# Altium PCB VariableStroboscope_Rev1.1.PcbDoc
Units mm, origin at the board's own origin, x right, y up, seen from the top; angles counter-clockwise.
Board outline 22 x 22 mm, 2 copper layers (Top Layer, Bottom Layer); 12 components, 9 nets, 38 pads, 0 vias.
Unrouted connection lines stored in the file: 1.
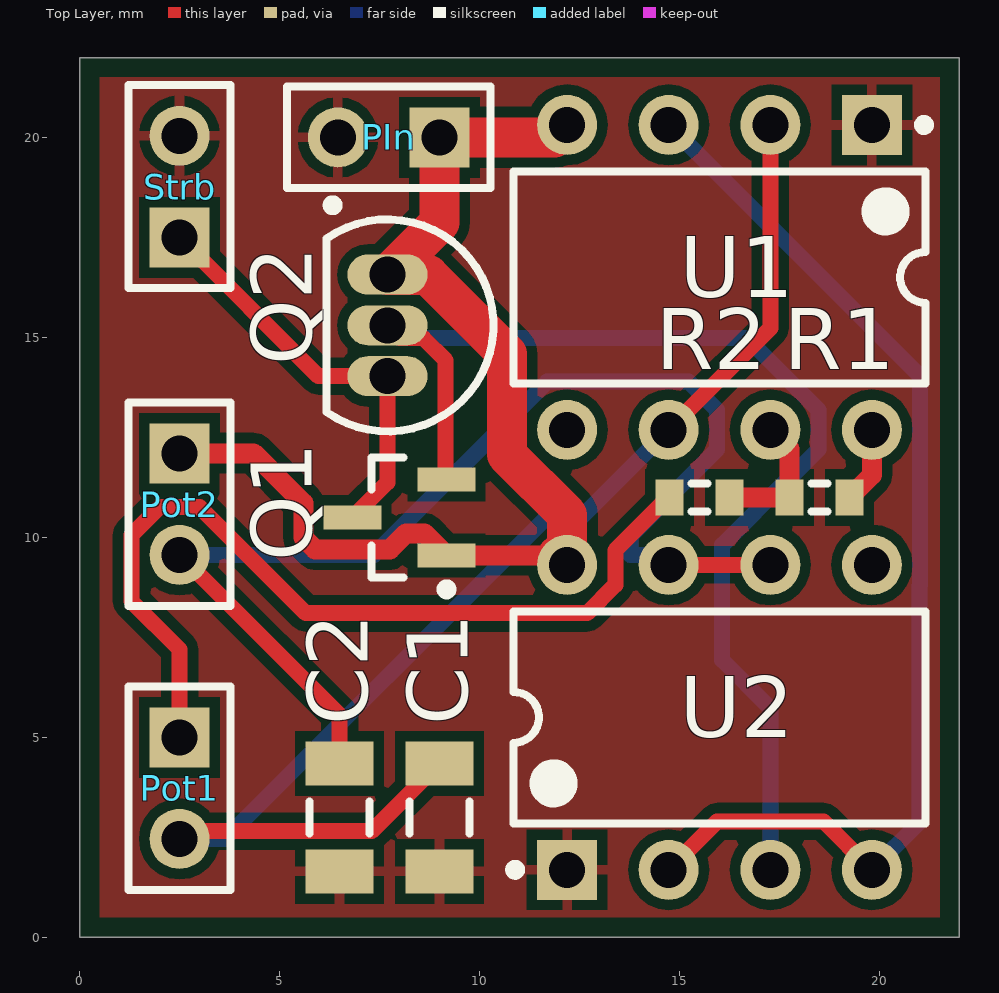
[diagram p0: Top Layer view]
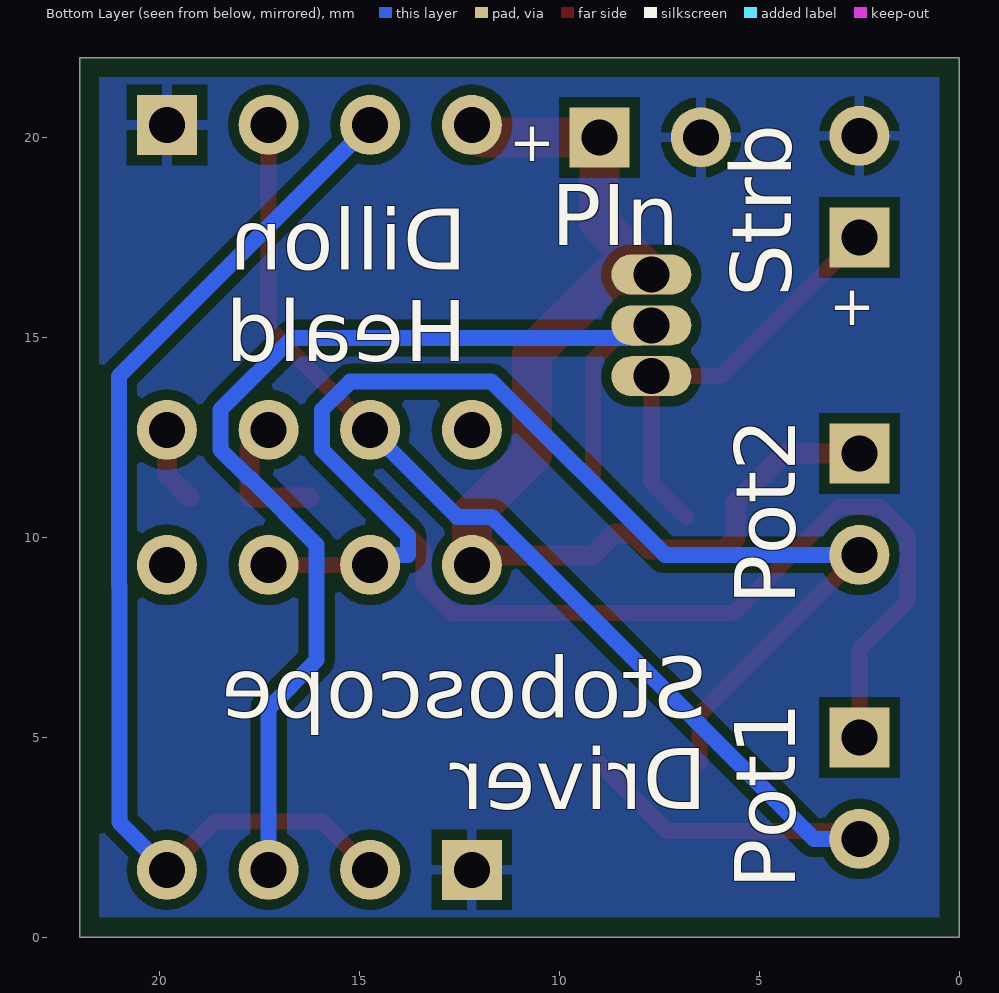
[diagram p1: Bottom Layer view, seen from below]

## Layer stack, top to bottom
Top Solder: solder mask 0.0102, Solder Resist, Dk 3.5
Top Layer: signal copper 0.0356
Dielectric 1: dielectric 0.32, FR-4, Dk 4.8
Bottom Layer: signal copper 0.0356
Bottom Solder: solder mask 0.0102, Solder Resist, Dk 3.5

## Board outline
0,0 21.996,0 21.996,21.996 0,21.996

## Design rules (kind name [scope] priority, off if disabled: settings)
Clearance [All] p1: gap=0.254
HoleSize [All] p1: absolutevalues=TRUE maxlimit=2.54 minlimit=0.254 maxpercent=80.000 minpercent=20.000
PolygonConnect [All] p1: connectstyle=Relief reliefconductorwidth=0.254 reliefentries=4 polygonreliefangle="90 Angle" airgapwidth=0.254
RoomDefinition VariableStoboscope_Rev1.0 [InComponentClass('VariableStoboscope_Rev1.0')] p1: confinementstyle=ConfineIn formatcopy=TRUE lockcomponents=FALSE outline 0.5,0.5 21.5,0.5 21.5,21.5 0.5,21.5
RoutingVias [All] p1: holewidth=0.711 width=1.27 viastyle="Through Hole" minholewidth=0.711 minwidth=1.27 maxholewidth=0.711 maxwidth=1.27
SolderMaskExpansion [All] p1: expansion=0.102
Width [All] p1: maxlimit=1 minlimit=0.4 preferedwidth=0.5
29 further rules are at their usual default settings.

## Components (designator, comment, footprint, x,y, rotation, side; value= is the part's Value field where it differs from the comment)
C1 "Cap Semi" C1206 9,3 r90 top
C2 "Cap Semi" C1206 6.5,3 r90 top
PIn "Header 2" HDR1X2 9,20 r180 top
Pot1 "PotExt1" HDR1X2 2.5,5 r270 top
Pot2 "PotExt2" HDR1X2 2.5,12.1 r270 top
Q1 "BD439_1" SOT-23B_M 8,10.5 r180 top
Q2 "BD439_2" TO-226-AA 7.7,15.3 r180 top
R1 "Res3" J1-0603 18.5,11 r0 top
R2 "Res3" J1-0603 15.5,11 r180 top
Strb "Header 2" HDR1X2 2.5,17.5 r90 top
U1 "LM555CN/NOPB" N08E 16,16.5 r270 top
U2 "LM555CN/NOPB" N08E 16,5.5 r90 top

## Footprints (in the part's own frame and the unit in brackets; to place one, negate y for a bottom-side part, rotate by r counter-clockwise, add the part's x,y. Pads: shape width x height; smd on the part's side, far side on the other; paste and mask are expansions set on the pad)
C1206 [mm] "Chip Capacitor, Body 3.2x1.6mm, IPC High Density"
  rect 1.1x1.7 smd: 1(-1.35,0) 2(1.35,0)
  silkscreen extent -0.4,-0.75 0.4,0.75, body extent -1.7,-0.9 1.7,0.9, height 1.3
HDR1X2 [mm] "Connector; Header; 2 Position"
  rect 1.5x1.5 hole 0.9: 1(0,0)
  round 1.5 hole 0.9: 2(2.54,0)
  silkscreen extent -1.27,-1.27 3.81,1.27
J1-0603 [mm] "Chip Resistor, Body 1.6x0.8mm, IPC High Density"
  rect 0.7x0.9 smd: 1(-0.75,0) 2(0.75,0)
  silkscreen extent -0.2,-0.35 0.2,0.35, body extent -0.85,-0.48 0.85,0.48, height 0.9
N08E [mm] "DIP, 8-Pin, Row Spacing 7.62 mm, Pitch 2.54 mm"
  rect 1.5x1.5 hole 0.9: 1(-3.81,3.81)
  round 1.5 hole 0.9: 2(-3.81,1.27) 3(-3.81,-1.27) 4(-3.81,-3.81) 5(3.81,-3.81) 6(3.81,-1.27) 7(3.81,1.27) 8(3.81,3.81)
  silkscreen extent -3.93,-5.15 2.65,5.24, body extent -3.6,-5.15 3.6,5.15, height 5.33
SOT-23B_M [mm] "SOT23, 3-Leads, Body 2.9x1.3mm, Pitch 0.95mm, Lead Span 2.4mm, IPC Low Density"
  rect 1.45x0.6 smd: 1(-1.175,0.95) 2(-1.175,-0.95) 3(1.175,0)
  silkscreen extent -1.3,-1.5 0.7,1.92, body extent -0.7,-1.5 0.7,1.5, height 1.14
TO-226-AA [mm] "TO, Flat Index; 3 In-Line, Axial Leads; Body Dia. 4.8mm; Leads 0.55 x 0.51 mm (max)"
  oval 2x1 hole 0.9: 1(0,-1.27) 2(0,0) 3(0,1.27)
  silkscreen extent -2.65,-3.13 1.52,2.65, body extent -2.65,-2.66 1.52,2.66, height 5.33

## Part data
C1 C2: "Capacitor (Semiconductor SIM Model)"
PIn Strb: "Header, 2-Pin"
Pot1 Pot2: library part "Header 2", "Header, 2-Pin"
Q1: library part QNPN, "NPN Bipolar Transistor"
Q2: library part NPN, "NPN Bipolar Transistor"
R1 R2: "Resistor"
U1 U2: library part CMP-0056-00016-2, "Timer, 8-pin MDIP, Pb-Free"

## Nets (pads, with @x,y where several pads share a name; then routed paths per layer and width w, separated by ;. In a path a pad name is that pad's centre, name@x,y a point inside that pad or via, vN(x,y) a via of type N, cw(c..) or ccw(c..) an arc to the next point about the centre after c; other vN are vias at no path point)
GND: C1.1 C2.1 PIn.2 Strb.2 U1.1 U2.1
NetC1_2: C1.2 Pot1.2 U1.2 U1.6 | length 32.5
  Top Layer w0.4: Pot1.2 2.5,2.654 7.304,2.654 C1.2 ; U1.6 17.27,15.23 U1.2
  Bottom Layer w0.4: Pot1.2 3.637,2.46 11.691,10.514 12.554,10.514 U1.6
NetC2_2: C2.2 Pot2.2 U2.6 U2.7 | length 30.5
  Top Layer w0.4: Pot2.2 6.5,5.56 C2.2 ; U2.7 U2.6
  Bottom Layer w0.4: Pot2.2 7.357,9.56 11.691,13.894 15.229,13.894 15.934,13.189 15.934,12.191 13.78,10.037 13.78,9.56 14.48,9.56 U2.7
NetPot1_1: Pot1.1 R2.2 | length 22.1
  Top Layer w0.4: Pot1.1 2.5,7.2 1.296,8.404 1.296,10.059 2.001,10.764 2.999,10.764 5.657,8.106 12.689,8.106 13.394,8.811 13.394,9.677 14.717,11 R2.2
NetQ1_2: Q1.2 Q2.2 U2.3 | length 29
  Top Layer w0.4: Q2.2 8.016,14.984 8.595,14.984 9.154,14.425 Q1.2@9.154,11.471
  Bottom Layer w0.4: Q2.2@8.016,14.984 16.679,14.984 18.474,13.189 18.474,12.191 17.769,11.486 17.743,11.486 16.066,9.809 16.066,6.934 17.27,5.73 U2.3
NetQ1_3: Q1.3 Q2.3 Strb.1 | length 10.5
  Top Layer w0.4: Strb.1 5.97,14.03 Q2.3 7.7,11.375 Q1.3
NetR1_1: R1.1 R2.1 U1.7 | length 3.4
  Top Layer w0.5: R2.1 R1.1 17.75,12.21 U1.7
NetU1_3: U1.3 U2.2 U2.4 | length 27.8
  Top Layer w0.4: U2.2 15.94,2.9 18.6,2.9 U2.4
  Bottom Layer w0.4: U1.3 21.014,14.026 21.014,8.797 21,8.783 21,2.88 U2.4
VCC: PIn.1 Pot2.1 Q1.1 Q2.1 R1.2 U1.4 U1.8 U2.8 | length 30.2
  Top Layer w0.5: Pot2.1 4.354,12.1 5.596,10.858 5.596,9.991 5.891,9.696 7.759,9.696 8.163,10.1 8.625,10.1 Q1.1 U2.8@11.95,9.55 ; R1.2 19.81,11.56 U1.8
  Top Layer w1: U1.4@11.88,20 PIn.1 9,17.87 Q2.1 7.716,16.554 8.719,16.554 10.686,14.587 10.686,12.067 12.19,10.563 U2.8 U2.8@11.95,9.55
pads on no net: U1.5 U2.5

## Polygon pours and split planes (outlines as drawn)
GND on Top Layer "Top Layer Pour" (solid, pour order 0): 0.5,0.5 0.5,21.5 21.5,21.5 21.5,0.5 0.5,0.5
GND on Bottom Layer "Bottom Layer Pour" (solid, pour order 2): 0.5,0.5 21.5,0.5 21.5,21.5 0.5,21.5 0.5,0.5

## Silkscreen, mask and mechanical layers (free items; w line width, h text height)
Bottom Overlay:
  text "+" at 10.1,19.4 h1
  text "+" at 2.1,15.3 h1
  text "Dillon / Heald" at 12.3,14.4 h1.52
  text "Stoboscope / Driver" at 6.3,3.2 h1.52
Mechanical 1:
  the board outline again, w0.254